# Altium PCB MP3438 Prototype.PcbDoc
Units mil, origin at the board's own origin, x right, y up, seen from the top; angles counter-clockwise.
Board outline 1370 x 1035 mil, 2 copper layers (Top Layer, Bottom Layer); 11 components, 8 nets, 29 pads, 67 vias.
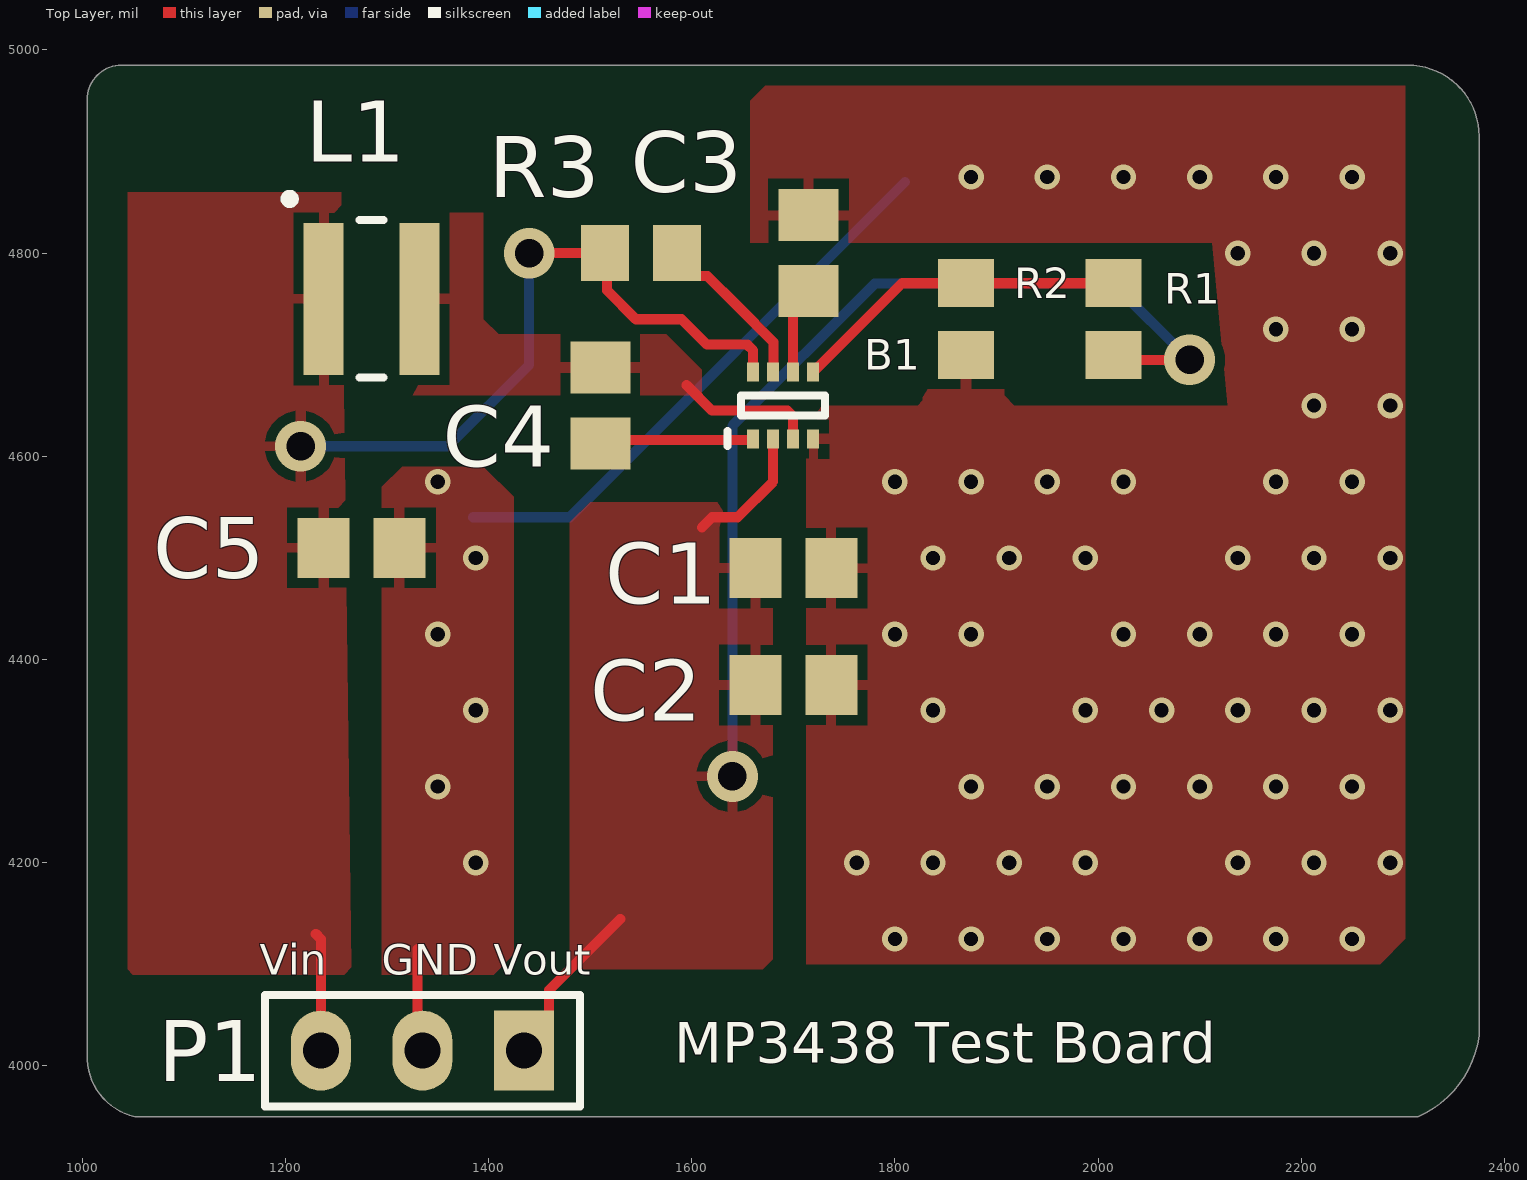
[diagram p0: Top Layer view]
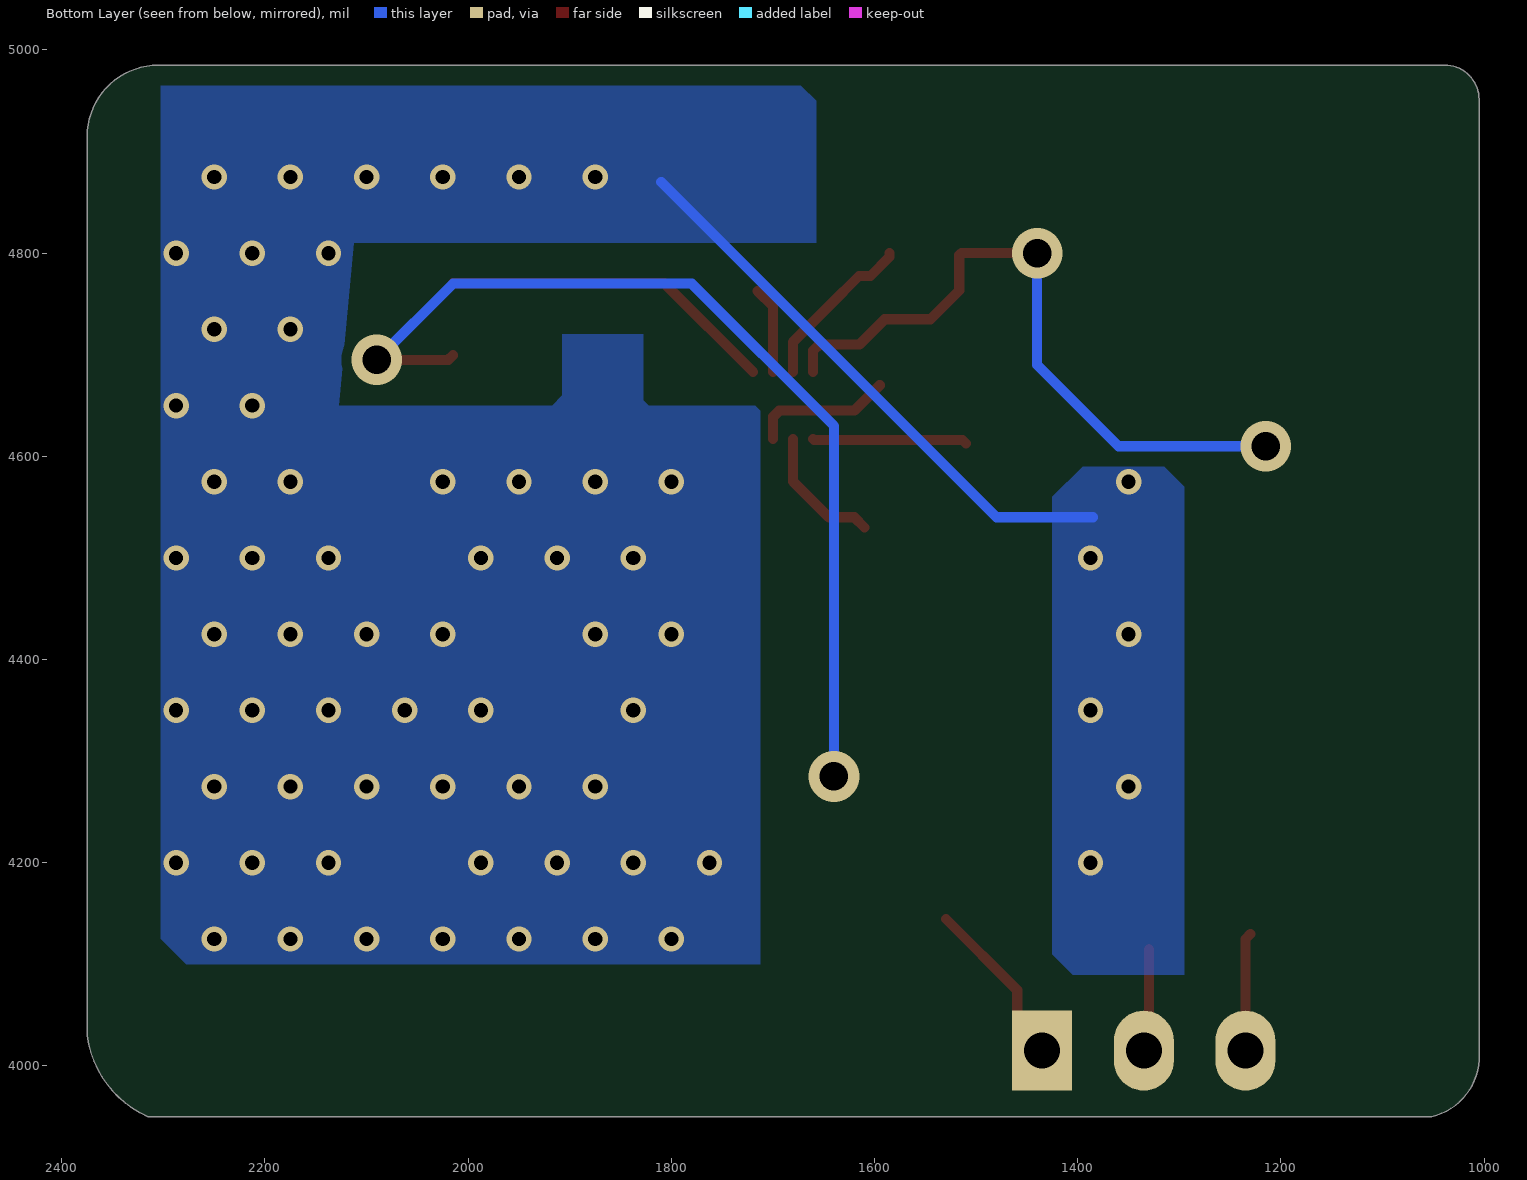
[diagram p1: Bottom Layer view, seen from below]
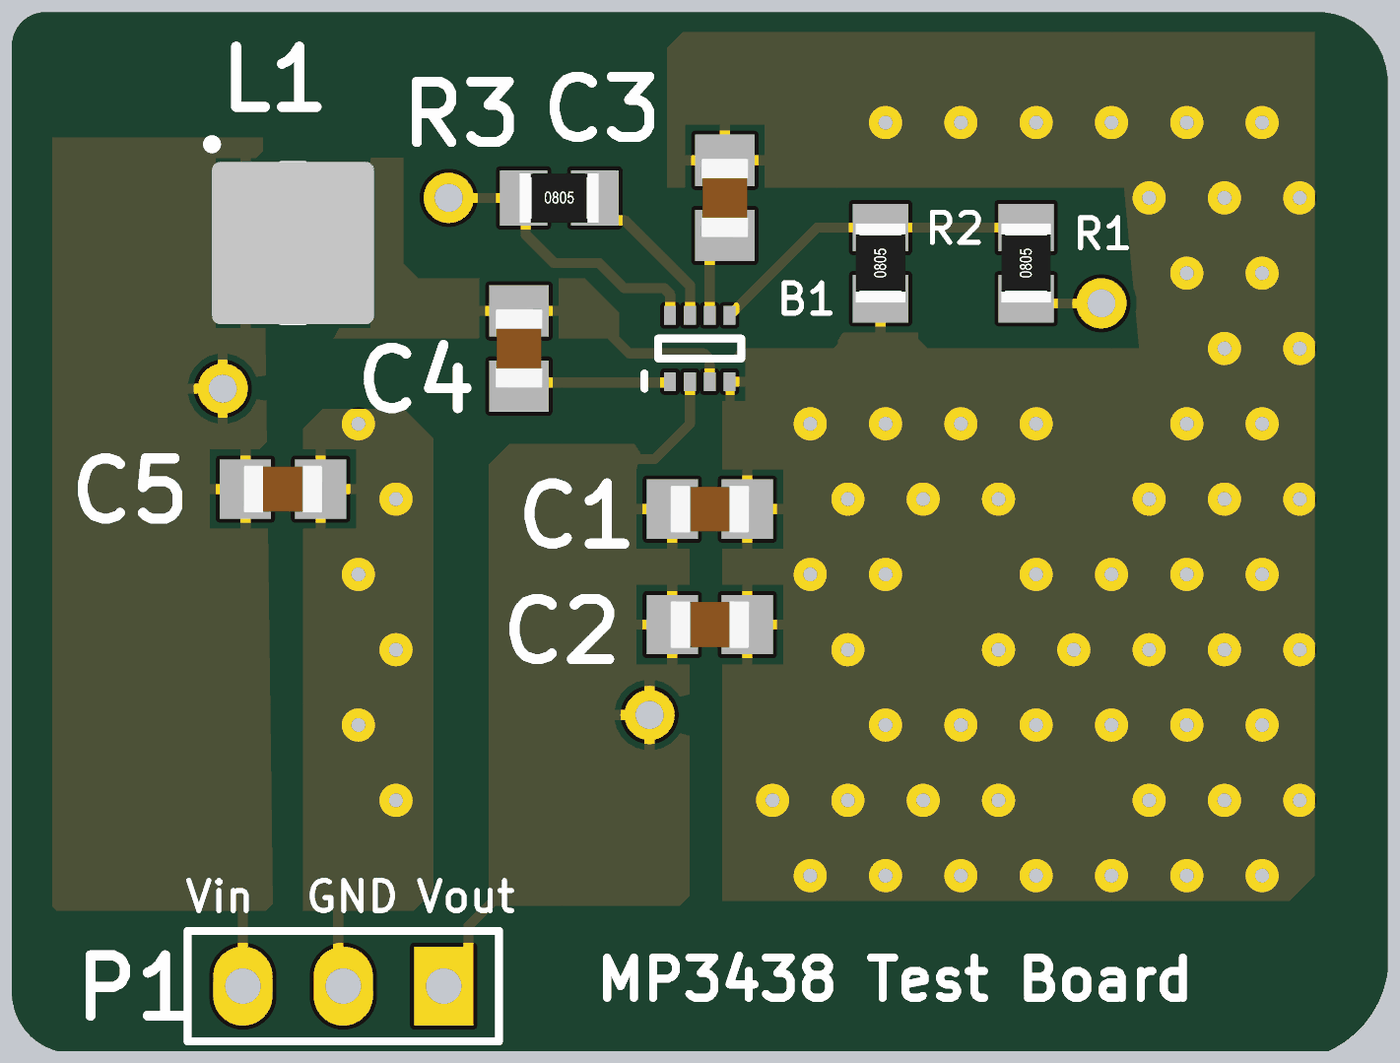
[diagram p2: 3D render of the assembled board from above, using the file's embedded part models]

## Layer stack, top to bottom
Top Solder: solder mask 0.4, Solder Resist, Dk 3.5
Top Layer: signal copper 1.4
Dielectric 1: dielectric 12.6, FR-4, Dk 4.8
Bottom Layer: signal copper 1.4
Bottom Solder: solder mask 0.4, Solder Resist, Dk 3.5

## Board outline
1051.76,3950 cw(c1065.77,4009.17) 1005,4011.15 1005,4951.27 cw(c1038.73,4951.27) 1038.73,4985 2305,4985 cw(c2305,4915) 2375,4915 2375,4030 cw(c2273.9,4043.33) 2315,3950

## Design rules (kind name [scope] priority, off if disabled: settings)
Clearance "Stitching GND" [IsStitchingVia and InNet('GND') vs (IsVia and (Not IsStitchingVia)) Or IsPad] p1: gap=5 ignorepadtopadclearanceinfootprint=FALSE
Clearance [All] p2: gap=10 ignorepadtopadclearanceinfootprint=FALSE except(6: Arc-Arc Arc-Track Arc-SMDPad Track-Track Track-SMDPad SMDPad-SMDPad)
PolygonConnect [All] p1: thpad.connectstyle=Relief thpad.reliefconductorwidth=10 thpad.reliefentries=4 thpad.polygonreliefangle="90 Angle" thpad.airgapwidth=10 smdpad.connectstyle=Relief smdpad.reliefconductorwidth=10 smdpad.reliefentries=4 smdpad.polygonreliefangle="90 Angle" smdpad.airgapwidth=10 via.connectstyle=Direct via.reliefconductorwidth=10 via.reliefentries=4 via.polygonreliefangle="90 Angle" via.airgapwidth=10
RoutingVias [All] p1: holewidth=28 width=50 viastyle="Through Hole" minholewidth=28 minwidth=50 maxholewidth=28 maxwidth=50
SilkToSolderMaskClearance [IsPad] p1: minsilkscreentomaskgap=8 clearancetoexposedcopper=TRUE
SolderMaskExpansion [All] p1: expansion=4 istentingtop=FALSE
SupplyNets "Schematic Supply Nets_2" [InNet('GND')] p1: voltage=0.000
SupplyNets "Schematic Supply Nets_1" [InNet('Vin')] p2: voltage=0.000
SupplyNets "Schematic Supply Nets" [InNet('Vout')] p3: voltage=0.000
Width [All] p1: maxlimit=10 minlimit=10 preferedwidth=10
29 further rules are at their usual default settings.

## Components (designator, comment, footprint, x,y, rotation, side; value= is the part's Value field where it differs from the comment)
B1 "MP3438GTL-Z" SOTFL50P160X60-8N 1690,4650 r90 top
C1 "10u" ece-CC2012-0805 1700,4490 r180 top
C2 "0.1u" ece-CC2012-0805 1700,4375 r180 top
C3 "1u" ece-CC2012-0805 1715,4800 r270 top
C4 "0.1u" ece-CC2012-0805 1510,4650 r90 top
C5 "4.7u" ece-CC2012-0805 1275,4510 r0 top
L1 "3.3u" MPL-AL4020 1285,4755 r0 top
P1 "Header 3" ece-HDR1X3 1435,4015 r180 top
R1 "750k" RESC2012-0805SM 2015,4735 r90 top
R2 "68k" RESC2012-0805SM 1870,4735 r90 top
R3 "30k" RESC2012-0805SM 1550,4800 r0 top

## Footprints (in the part's own frame and the unit in brackets; to place one, negate y for a bottom-side part, rotate by r counter-clockwise, add the part's x,y. Pads: shape width x height; smd on the part's side, far side on the other; paste and mask are expansions set on the pad)
ece-CC2012-0805 [mm] "SM capacitor 0805"
  rect 1.3x1.5 smd: 1(-0.95,0) 2(0.95,0)
  body extent -1,-0.6 1,0.6, height 1.2
ece-HDR1X3 [mm] "Header 3 way"
  rect 1.5x2 hole 0.9: 1(0,0)
  oval 1.5x2 hole 0.9: 2(2.54,0) 3(5.08,0)
  silkscreen extent -1.4,-1.4 6.48,1.4
MPL-AL4020 [mm] "Chip Inductor, 2-Leads, Body 4.10x4.10mm, IPC Medium Density"
  rect 1x3.8 smd: 1(-1.2,0) 2(1.2,0)
  silkscreen extent -2.15,-1.97 0.3,2.6, body extent -2.05,-2.05 2.05,2.05, height 1.9
RESC2012-0805SM [mm] "Chip Resistor, Body 2.0x1.3mm, IPC Medium Density"
  rect 1.2x1.4 smd: 1(-0.9,0) 2(0.9,0)
  body extent -1,-0.62 1,0.63, height 0.5
SOTFL50P160X60-8N [mm]
  rect 0.475x0.3 smd: 1(-0.838,0.75) 2(-0.838,0.25) 3(-0.838,-0.25) 4(-0.838,-0.75) 5(0.838,-0.75) 6(0.838,-0.25) 7(0.838,0.25) 8(0.838,0.75)
  silkscreen extent -1.02,-1.05 0.25,1.4

## Part data
B1: "Switching Voltage Regulators 2A, 16V, High Efficiency Fully-Integrated Synchronous Boost Converter", Manufacturer_Name="Monolithic Power Systems (MPS)", Mouser Part Number=946-MP3438GTL-Z, Datasheet Link=https://www.monolithicpower.com/en/documentview/productdocument/index/version/2/document_type/Datasheet/lang/en/sku/MP3438GTL/, Geometry.Height=0.6mm, Manufacturer_Part_Number=MP3438GTL-Z, Mouser Price/Stock=https://www.mouser.co.uk/ProductDetail/Monolithic-Power-Systems-MPS/MP3438GTL-Z?qs=tlsG%2FOw5FFjfFO8TaWv5UA%3D%3D
C1 C2 C3 C4 C5: library part "CAP SM0805", "SM capacitor"
L1: library part MPL-AL4020-3R3, "Low-Resistance Molded Inductor 3.3µH"
P1: "Header, 3-Pin", LatestRevisionDate=17-Jul-2002, LatestRevisionNote="Re-released for DXP Platform.", Publisher="Altium Limited"
R1 R2 R3: library part "Res SM 0805", "SM resistor"

## Via types
v1: diameter 25, hole 14, Top Layer to Bottom Layer, 63 vias
v2: diameter 50, hole 28, Top Layer to Bottom Layer, 4 vias

## Nets (pads, with @x,y where several pads share a name; then routed paths per layer and width w, separated by ;. In a path a pad name is that pad's centre, name@x,y a point inside that pad or via, vN(x,y) a via of type N, cw(c..) or ccw(c..) an arc to the next point about the centre after c; other vN are vias at no path point)
GND: B1.4 C1.1 C2.1 C3.1 C5.2 P1.2 R2.1 | length 663.8
  Top Layer w10: 1330,4115 1330,4020 P1.2
  Bottom Layer w10: 1385,4540 1480,4540 1810,4870
  other v1: 1800,4125 1875,4125 1950,4125 2025,4125 2100,4125 2175,4125 2250,4125 1387.5,4200 1762.5,4200 1837.5,4200 1912.5,4200 1987.5,4200 2137.5,4200 2212.5,4200 2287.5,4200 1350,4275 1875,4275 1950,4275 2025,4275 2100,4275 2175,4275 2250,4275 1387.5,4350 1837.5,4350 1987.5,4350 2062.5,4350 2137.5,4350 2212.5,4350 2287.5,4350 1350,4425 1800,4425 1875,4425 2025,4425 2100,4425 2175,4425 2250,4425 1387.5,4500 1837.5,4500 1912.5,4500 1987.5,4500 2137.5,4500 2212.5,4500 2287.5,4500 1350,4575 1800,4575 1875,4575 1950,4575 2025,4575 2175,4575 2250,4575 2212.5,4650 2287.5,4650 2175,4725 2250,4725 2137.5,4800 2212.5,4800 2287.5,4800 1875,4875 1950,4875 2025,4875 2100,4875 2175,4875 2250,4875
NetB1_1: B1.1 C4.1 | length 152.3
  Top Layer w10: C4.1 1513.5,4616.1 1659.57,4616.1 B1.1
NetB1_3: B1.3 C4.2 L1.2 | length 139.8
  Top Layer w10: 1595,4670 1620,4645 1693.98,4645 1699.84,4639.14 B1.3
NetB1_5: B1.5 R1.2 R2.2 | length 331.7
  Top Layer w10: B1.5 1806.97,4770.43 R2.2 R1.2
NetB1_6: B1.6 C3.2 | length 85.9
  Top Layer w10: B1.6 1699.84,4747.44 C3.2
NetB1_7: B1.7 R3.2 | length 163
  Top Layer w10: R3.2 1585.43,4796.16 1604.06,4777.54 1615.36,4777.54 1644.7,4748.2 1680.47,4712.43 B1.7@1680.47,4682.99
Vin: B1.8 C5.1 L1.1 P1.3 R3.1 | length 786.8
  Top Layer w10: 1230,4130 1235,4125 P1.3 ; v2(1440,4800) R3.1 1516.7,4797.87 1516.7,4763.3 1545,4735 1590,4735 1615,4710 1654.61,4710 1660.47,4704.14 B1.8
  Bottom Layer w10: v2(1215,4610) 1360,4610 1440,4690 v2(1440,4800)
Vout: B1.2 C1.2 C2.2 P1.1 R1.1 | length 1260.6
  Top Layer w10: P1.1 1459.53,4039.53 1459.53,4074.53 1529.73,4144.73 ; 1610,4530 1620,4540 1645,4540 1680.16,4575.16 B1.2 ; R1.1 2019.57,4695 v2(2090,4695)
  Bottom Layer w10: v2(1640,4285) 1640,4630 1780,4770 2015,4770 v2(2090,4695)

## Polygon pours and split planes (outlines as drawn)
GND on Top Layer "GND_L01_P004" (solid, pour order 4): 1295,4090 1295,4570 1315,4590 1395,4590 1425,4560 1425,4110 1405,4090
GND on Top Layer "GND_L01_P007" (solid, pour order 7): 1712.5,4645 1717.5,4650 1822.5,4650 1827.5,4655 1827.5,4720 1907.5,4720 1907.5,4660 1917.5,4650 2127.5,4650 2112.5,4810 1657.5,4810 1657.5,4950 1672.5,4965 2302.5,4965 2302.5,4125 2277.5,4100 1712.5,4100
Vout on Top Layer "VOUT_L01_P006" (solid, pour order 6): 1680,4555 1680,4105 1670,4095 1480,4095 1480,4535 1500,4555
Vin on Top Layer "VIN_L01_P003" (solid, pour order 3): 1255,4860 1045,4860 1045,4095 1050,4090 1265,4090
NetB1_3 on Top Layer "NETB1_3_L01_P005" (solid, pour order 5): 1310,4840 1310,4665 1315,4660 1610,4660 1610,4685 1575,4720 1410,4720 1395,4735 1395,4840
GND on Bottom Layer "GND_L02_P012" (solid, pour order 12): 1712.5,4645 1717.5,4650 1822.5,4650 1827.5,4655 1827.5,4720 1907.5,4720 1907.5,4660 1917.5,4650 2127.5,4650 2112.5,4810 1657.5,4810 1657.5,4950 1672.5,4965 2302.5,4965 2302.5,4125 2277.5,4100 1712.5,4100
GND on Bottom Layer "GND_L02_P010" (solid, pour order 10): 1295,4090 1295,4570 1315,4590 1395,4590 1425,4560 1425,4110 1405,4090

## Silkscreen, mask and mechanical layers (free items; w line width, h text height)
Top Overlay:
  text "Vin" at 1175,4090 h30
  text "GND" at 1295,4090 h30
  text "Vout" at 1405,4090 h30
  text "MP3438 Test Board" at 1583,4003 h40